# Altium PCB BLE113.PcbDoc
Units mm, origin at the board's own origin, x right, y up, seen from the top; angles counter-clockwise.
Board outline 25 x 25 mm, 2 copper layers (Top Layer, Bottom Layer); 16 components, 46 nets, 158 pads, 65 vias.
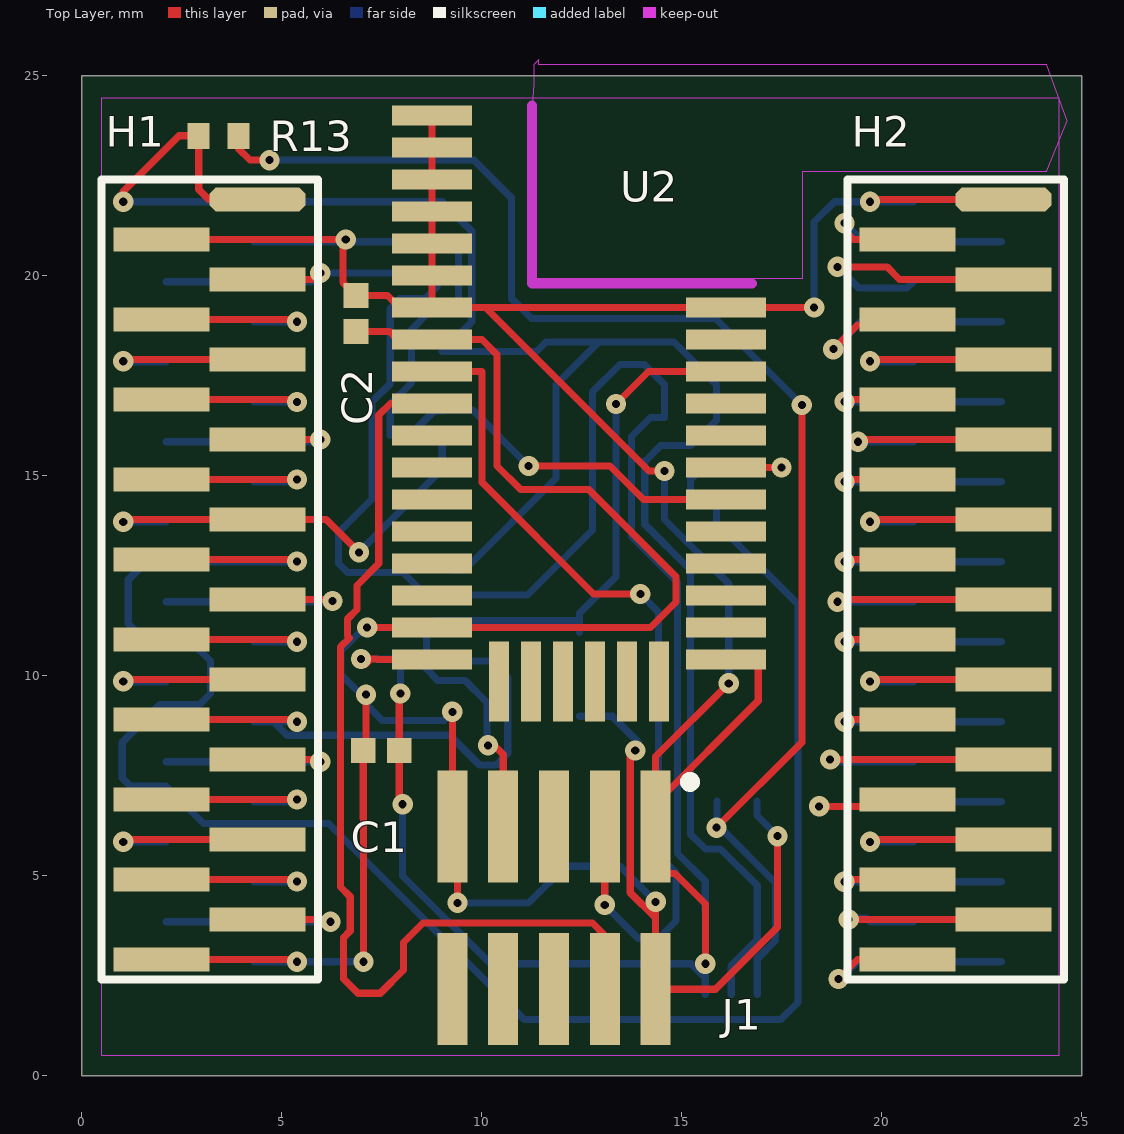
[diagram p0: Top Layer view]
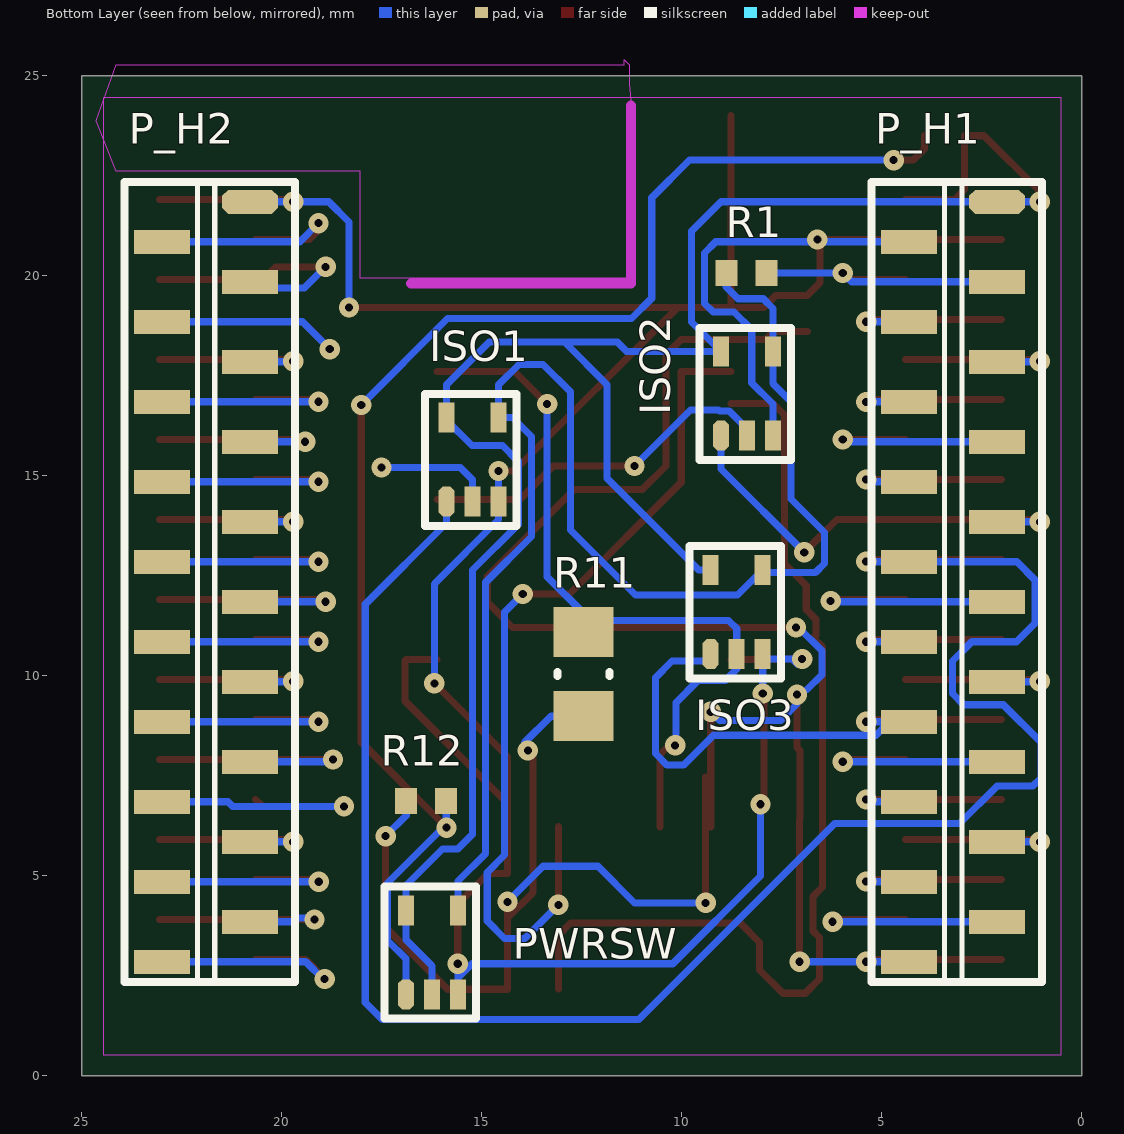
[diagram p1: Bottom Layer view, seen from below]

## Layer stack, top to bottom
Top Layer: signal copper 0.0356
Dielectric: dielectric 0.32, FR-4, Dk 4.8
Bottom Layer: signal copper 0.0356

## Board outline
0,0 25,0 25,25 0,25

## Design rules (kind name [scope] priority, off if disabled: settings)
Clearance "Clearance~Sunstone Circuits" [All] p1: gap=0.152 // Sunstone Circuits Minimum Clearance Rule (MLB~4&6 Layer Designs)
HoleSize "HoleSize~Sunstone Circuits" [All] p1: absolutevalues=TRUE maxlimit=6.375 minlimit=0.203 maxpercent=80.000 minpercent=20.000 // Sunstone Circuits Hole Size Rule (MLB~4&6 Layer Designs)
HoleSize Testpoint [All] p2: absolutevalues=TRUE maxlimit=2.54 minlimit=0.025 maxpercent=80.000 minpercent=20.000
HoleSize TestPointUsage [All] p3: absolutevalues=TRUE maxlimit=2.54 minlimit=0.025 maxpercent=80.000 minpercent=20.000
MinimumAnnularRing "MinimumAnnularRing~Sunstone Circuits" [All] p1: minimumring=0.152 // Sunstone Circuits Minimum Annular Ring (MLB~4&6 Layer Designs)
MinimumSolderMaskSliver [All] p1: minsoldermaskwidth=0.127
PlaneClearance "PlaneClearance~Sunstone Circuits" [All] p1: clearance=0.305 // Sunstone Circuits Power Plane Clearance Rule (MLB~4&6 Layer Designs)
PlaneConnect "PlaneConnect~Sunstone Circuits" [All] p1: planeconnectstyle=Relief reliefexpansion=0.254 reliefentries=4 reliefconductorwidth=0.203 reliefairgap=0.254 // Sunstone Circuits Power Plane Connect Rule (MLB~4&6 Layer Designs)
PolygonConnect "PolygonConnect~Sunstone Circuits" [All] p1: connectstyle=Relief reliefconductorwidth=0.203 reliefentries=4 polygonreliefangle="90 Angle" airgapwidth=0.254 // Sunstone Circuits Polygon Connect Style (MLB~4&6 Layer Designs)
RoutingVias "RoutingVias~Sunstone Circuits" [All] p1: holewidth=0.203 width=0.508 viastyle="Through Hole" minholewidth=0.203 minwidth=0.508 maxholewidth=0.203 maxwidth=0.508 // Sunstone Circuits Routing Vias Rule (MLB~4&6 Layer Designs)
SMDNeckDown [All] p1: percent=100.000
ShortCircuit "ShortCircuit~Sunstone Circuits" [All] p1: allowed=FALSE // Sunstone Circuits Short Circuit Rule~Do Not Allow (MLB~4&6 Layer Designs)
SolderMaskExpansion "SolderMaskExpansion~Sunstone Circuits" [All] p1: expansion=0.076 // Sunstone Circuits Solder Mask Expansion Rule (MLB~4&6 Layer Designs)
ViasUnderSMD "ViasUnderSMD~Sunstone Circuits" [All] p1: allowed=FALSE // Sunstone Circuits Vias Under SMD~Do Not Allow (MLB~4&6 Layer Designs)
Width "Width~Sunstone Circuits" [All] p1: maxlimit=0.178 minlimit=0.178 preferedwidth=0.178 // Sunstone Circuits Minimum Width Rule (MLB~4&6 Layer Designs)
23 further rules are at their usual default settings.

## Components (designator, comment, footprint, x,y, rotation, side; value= is the part's Value field where it differs from the comment)
C1 "CAP 470nF 4V 0402(1005)" CAPC0402(1005)60_N 7.493,8.128 r180 top
C2 "CAP 470nF 4V 0402(1005)" CAPC0402(1005)60_N 6.858,19.05 r270 top
H1 "Bus_Header_1" "Male Single row 20 pin header" 2,21.9 r0 top
H2 "Bus_Header_2" "Male Single row 20 pin header" 20.65,21.9 r0 top
ISO1 "ISL84715" ISL84715 15.875,14.351 r90 bottom
ISO2 "ISL84715" ISL84715 9.017,16.002 r90 bottom
ISO3 "ISL84715" ISL84715 9.271,10.541 r90 bottom
J1 "JTAG" FTSH-105-XX-X-DV 11.811,4.191 r0 top
P_H1 "Bus_Header_1" "SMT 20 -pin single row female header" 4.314,21.844 r180 bottom
P_H2 "Bus_Header_2" "SMT 20 -pin single row female header" 22.991,21.844 r180 bottom
PWRSW "ISL84715" ISL84715 16.891,2.032 r90 bottom
R1 "Jumper 0402(1005)" RESC0402(1005)_N 8.382,20.066 r180 bottom
R11 "5R1 5% 0805(2012)" RESC0805(2012)_M 12.446,10.033 r270 bottom
R12 "1R 5% 0402(1005)" RESC0402(1005)_N 16.383,6.858 r180 bottom
R13 "Jumper 0402(1005)" RESC0402(1005)_N 3.429,23.495 r0 top
U2 "BlueGiga" BlueGiga 8.763,24.003 r0 top

## Footprints (in the part's own frame and the unit in brackets; to place one, negate y for a bottom-side part, rotate by r counter-clockwise, add the part's x,y. Pads: shape width x height; smd on the part's side, far side on the other; paste and mask are expansions set on the pad)
BlueGiga [mm]
  rect 2x0.5 smd: 1(0,0) 2(0,-0.8) 3(0,-1.6) 4(0,-2.4) 5(0,-3.2) 6(0,-4) 7(0,-4.8) 8(0,-5.6) 9(0,-6.4) 10(0,-7.2) 11(0,-8) 12(0,-8.8) 13(0,-9.6) 14(0,-10.4) 15(0,-11.2) 16(0,-12) 17(0,-12.8) 18(0,-13.6) 25(7.35,-13.6) 26(7.35,-12.8) 27(7.35,-12) 28(7.35,-11.2) 29(7.35,-10.4) 30(7.35,-9.6) 31(7.35,-8.8) 32(7.35,-8) 33(7.35,-7.2) 34(7.35,-6.4) 35(7.35,-5.6) 36(7.35,-4.8)
  rect 0.5x2 smd: 19(1.675,-14.15) 20(2.475,-14.15) 21(3.275,-14.15) 22(4.075,-14.15) 23(4.875,-14.15) 24(5.675,-14.15)
  Keep-Out Layer lines w0.254: 2.5,0.25 2.5,-4.2 8,-4.2
CAPC0402(1005)60_N [mm] "Chip Capacitor, Body 1.0x0.5mm, Height 0.6mm, IPC Medium Density"
  rect 0.62x0.62 smd: 1(-0.45,0) 2(0.45,0)
  body extent -0.55,-0.3 0.55,0.3, height 0.6
FTSH-105-XX-X-DV [mm]
  rect 0.75x2.8 smd mask+0: 1(2.54,2.03) 2(2.54,-2.03) 3(1.27,2.03) 4(1.27,-2.03) 5(0,2.03) 6(0,-2.03) 7(-1.27,2.03) 8(-1.27,-2.03) 9(-2.54,2.03) 10(-2.54,-2.03)
  silkscreen extent 3.28,3.03 3.52,3.27, body extent -3.17,-2.92 3.18,2.92, height 5.96
ISL84715 [mm]
  oct 0.75x0.4 smd: 1(0,0)
  rect 0.75x0.4 smd: 2(0,-0.65) 3(0,-1.3) 4(2.1,-1.3) 5(2.1,0)
  silkscreen extent -0.61,-1.75 2.69,0.53
"Male Single row 20 pin header" [mm]
  oct 2.4x0.6 smd: 1(2.4,0)
  rect 2.4x0.6 smd: 2(0,-1) 3(2.4,-2) 4(0,-3) 5(2.4,-4) 6(0,-5) 7(2.4,-6) 8(0,-7) 9(2.4,-8) 10(0,-9) 11(2.4,-10) 12(0,-11) 13(2.4,-12) 14(0,-13) 15(2.4,-14) 16(0,-15) 17(2.4,-16) 18(0,-17) 19(2.4,-18) 20(0,-19)
  silkscreen extent -1.5,-19.5 3.91,0.5
RESC0402(1005)_N [mm] "Chip Resistor, Body 1.0x0.5mm, IPC Medium Density"
  rect 0.55x0.65 smd: 1(-0.5,0) 2(0.5,0)
  body extent -0.52,-0.27 0.53,0.28, height 0.4
RESC0805(2012)_M [mm] "Chip Resistor, Body 2.0x1.3mm, IPC Low Density"
  rect 1.25x1.5 smd: 1(-1.05,0) 2(1.05,0)
  silkscreen extent -0.05,-0.65 0.05,0.65, body extent -1.1,-0.67 1.1,0.67, height 0.7
"SMT 20 -pin single row female header" [mm]
  oct 1.4x0.6 smd: 1(2.2,0)
  rect 1.4x0.6 smd: 2(0,-1) 3(2.2,-2) 4(0,-3) 5(2.2,-4) 6(0,-5) 7(2.2,-6) 8(0,-7) 9(2.2,-8) 10(0,-9) 11(2.2,-10) 12(0,-11) 13(2.2,-12) 14(0,-13) 15(2.2,-14) 16(0,-15) 17(2.2,-16) 18(0,-17) 19(2.2,-18) 20(0,-19)
  silkscreen extent -0.94,-19.5 3.33,0.5, body extent -0.8,-19.4 3,0.4, height 2.1

## Part data
C1 C2: library part CMP-1034-02101-1, "CAP 470nF 4V ±10% 0402 (1005 Metric) Thickness 0.6mm SMD"
J1: library part CC_JTAG, "CC_JTAG"
R1 R13: library part CMP-1011-00001-1, "Jumper 0402 (1005 Metric)"
R11: library part CMP-1013-00019-1, "5R1 0.125W 5% 0805 (2012 Metric)  SMD"
R12: library part CMP-1011-00002-1, "1R 0.063W 5% 0402 (1005 Metric)  SMD"

## Via types
v1: diameter 0.508, hole 0.203, Top Layer to Bottom Layer, 65 vias

## Nets (pads, with @x,y where several pads share a name; then routed paths per layer and width w, separated by ;. In a path a pad name is that pad's centre, name@x,y a point inside that pad or via, vN(x,y) a via of type N, cw(c..) or ccw(c..) an arc to the next point about the centre after c; other vN are vias at no path point)
DC: J1.3 U2.9 | length 21.9
  Top Layer w0.178: U2.9 10.008,17.603 10.008,14.834 12.802,12.04 v1(13.97,12.04) ; v1(13.081,4.267) J1.3
  Bottom Layer w0.178: v1(13.081,4.267) 13.919,3.429 14.427,3.429 14.859,3.861 14.859,5.08 14.427,5.512 14.427,11.582 v1(13.97,12.04)
DD: J1.4 U2.10 | length 25.4
  Top Layer w0.178: U2.10 7.722,16.803 7.429,16.511 7.429,12.802 6.883,12.255 6.883,11.648 6.644,11.408 6.644,10.998 6.7,10.942 6.477,10.719 6.477,4.712 6.718,4.47 6.718,3.619 6.553,3.454 6.553,2.413 6.909,2.057 7.468,2.057 8.052,2.642 8.052,3.327 8.534,3.81 12.776,3.81 13.081,3.505 J1.4
E118: H1.18 P_H1.18 | length 4.5
  Top Layer w0.178: H1.18 5.336,4.9 v1(5.385,4.851)
  Bottom Layer w0.178: P_H1.18 5.377,4.844 v1(5.385,4.851)
E119: H1.19 P_H1.19 | length 6
  Top Layer w0.178: H1.19 6.167,3.9 v1(6.223,3.844)
  Bottom Layer w0.178: P_H1.19 v1(6.223,3.844)
E218: H2.18 P_H2.18 | length 5.5
  Top Layer w0.178: v1(19.069,4.844) 19.125,4.9 H2.18
  Bottom Layer w0.178: v1(19.069,4.844) P_H2.18
E219: H2.19 P_H2.19 | length 5.8
  Top Layer w0.178: v1(19.177,3.9) H2.19
  Bottom Layer w0.178: v1(19.177,3.9) 19.087,3.9 19.05,3.937 19.617,3.937 19.71,3.844 P_H2.19
E220: H2.20 P_H2.20 | length 6.2
  Top Layer w0.178: v1@18.966,2.413 v1(18.923,2.413) 18.923,2.426 19.397,2.9 H2.20
  Bottom Layer w0.178: v1(18.923,2.413) 18.966,2.413 19.397,2.844 P_H2.20
EE117: H1.17 P_H1.17 | length 4.5
  Top Layer w0.178: v1(1.041,5.842) 1.099,5.9 H1.17
  Bottom Layer w0.178: v1(1.041,5.842) 1.043,5.844 P_H1.17
EH_VCC: H1.1 ISO1.5 ISO2.5 ISO3.5 P_H1.1 PWRSW.2 PWRSW.5 R13.1 | length 50.9
  Top Layer w0.178: v1(1.041,21.844) 1.041,22.098 2.438,23.495 R13.1 2.929,22.149 3.178,21.9 H1.1
  Bottom Layer w0.178: v1(1.041,21.844) P_H1.1 9.017,21.844 9.754,21.107 9.754,18.839 ISO2.5 11.371,18.102 11.608,18.339 12.929,18.339 ; ISO3.5 9.571,12.641 11.862,14.932 11.862,17.272 12.929,18.339 ; PWRSW.2 16.241,2.743 16.891,3.393 PWRSW.5 16.891,4.75 15.977,5.664 15.595,5.664 15.227,6.032 15.227,12.637 14.08,13.784 14.08,15.367 14.097,15.367 14.478,15.748 15.24,15.748 15.875,16.383 ISO1.5 15.875,17.272 14.808,18.339 12.929,18.339
GND: C1.1 C2.1 H1.2 H2.1 ISO1.3 ISO2.3 ISO3.3 J1.1 P_H1.2 P_H2.1 PWRSW.3 U2.1 U2.2 U2.3 U2.4 U2.5 U2.6 U2.7 U2.18 U2.25 U2.36 | length 85.8
  Top Layer w0.178: H1.2 v1@6.536,20.9 ; v1(6.604,20.9) v1@6.536,20.9 ; v1(6.985,10.414) 7.112,10.287 7.239,10.414 7.391,10.414 7.402,10.403 U2.18 ; v1(7.971,9.55) 7.943,9.522 C1.1 7.943,6.865 v1(8.026,6.782) ; U2.1 U2.2 U2.3 U2.4 U2.5 U2.6 U2.7 ; v1(14.575,15.113) 14.187,15.113 10.097,19.203 ; v1(15.596,2.794) 15.596,4.293 14.834,5.055 14.351,5.055 J1.1 J1.1@14.351,6.803 ; U2.25 16.891,10.403 16.918,10.376 16.918,9.371 J1.1@14.351,6.803 ; v1(16.18,9.804) 14.351,7.976 J1.1@14.351,6.803 ; v1(18.313,19.203) U2.36 10.097,19.203 ; v1(19.71,21.844) 19.766,21.9 H2.1 ; v1@6.536,20.9 6.536,19.822 C2.1 7.645,19.5 7.942,19.203 U2.7 ; U2.7 10.097,19.203
  Bottom Layer w0.178: P_H1.2 v1@6.548,20.844 ; v1(6.604,20.9) v1@6.548,20.844 ; v1(6.985,10.414) 7.112,10.287 7.239,10.414 7.844,10.414 ISO3.3 v1(7.971,9.55) ; ISO2.3 7.717,16.789 8.245,17.318 8.245,18.645 8.689,19.089 9.208,19.089 9.423,19.304 9.423,20.565 9.144,20.844 v1@6.548,20.844 ; v1(8.026,6.782) 8.026,4.989 10.222,2.794 15.24,2.794 15.591,2.443 ; v1(14.575,15.113) ISO1.3 14.575,13.898 16.18,12.294 v1(16.18,9.804) ; PWRSW.3 15.591,2.443 ; v1(15.596,2.794) 15.591,2.794 15.591,2.443 ; v1(18.313,19.203) 18.313,21.336 18.821,21.844 v1(19.71,21.844) P_H2.1
N10: H1.15 P_H1.15 | length 5.4
  Top Layer w0.178: H1.15 5.913,7.9 v1(5.969,7.844)
  Bottom Layer w0.178: P_H1.15 v1(5.969,7.844)
N11: H1.13 P_H1.13 | length 4.5
  Top Layer w0.178: v1(1.041,9.855) 1.086,9.9 H1.13
  Bottom Layer w0.178: v1(1.041,9.855) 1.053,9.844 P_H1.13
N12: H1.14 ISO3.1 P_H1.14 | length 14.5
  Top Layer w0.178: H1.14 5.329,8.9 v1(5.385,8.844)
  Bottom Layer w0.178: P_H1.14 P_H1.14@4.801,8.844 ; v1(5.385,8.844) P_H1.14@4.801,8.844 ; ISO3.1 9.271,10.363 10.236,10.363 10.655,9.944 10.655,8.05 10.365,7.76 9.955,7.76 9.206,8.509 5.136,8.509 P_H1.14@4.801,8.844
N13: H2.13 P_H2.13 | length 4.4
  Top Layer w0.178: v1(19.71,9.855) 19.755,9.9 H2.13
  Bottom Layer w0.178: v1(19.71,9.855) 19.722,9.844 P_H2.13
N14: H2.14 P_H2.14 | length 5.5
  Top Layer w0.178: v1(19.075,8.844) 19.131,8.9 H2.14
  Bottom Layer w0.178: v1(19.075,8.844) P_H2.14
N15: H1.16 P_H1.16 | length 4.5
  Top Layer w0.178: H1.16 v1(5.385,6.9)
  Bottom Layer w0.178: P_H1.16 5.329,6.844 v1(5.385,6.9)
N16: H2.9 P_H2.9 | length 4.4
  Top Layer w0.178: v1(19.71,13.844) 19.766,13.9 H2.9
  Bottom Layer w0.178: v1(19.71,13.844) P_H2.9
N17: H2.10 P_H2.10 | length 5.5
  Top Layer w0.178: v1(19.075,12.844) 19.131,12.9 H2.10
  Bottom Layer w0.178: v1(19.075,12.844) P_H2.10
N20: H1.10 ISO1.1 P_H1.10 | length 48.7
  Top Layer w0.178: H1.10 5.337,12.9 v1(5.385,12.852)
  Bottom Layer w0.178: v1(5.385,12.852) 5.376,12.844 P_H1.10 1.617,12.844 1.168,12.395 1.168,11.303 1.626,10.846 2.743,10.846 3.226,10.363 3.226,9.55 2.946,9.271 1.956,9.271 1.016,8.331 1.016,7.442 1.219,7.239 2.108,7.239 3.048,6.299 6.172,6.299 11.074,1.397 17.475,1.397 17.907,1.829 17.907,11.785 15.875,13.817 ISO1.1
N21: H1.9 ISO2.1 P_H1.9 | length 11.1
  Top Layer w0.178: v1(1.041,13.843) 1.098,13.9 H1.9 6.115,13.9 v1(6.934,13.081)
  Bottom Layer w0.178: v1(1.041,13.843) v1(1.041,13.843) P_H1.9 ; v1(6.934,13.081) 9.017,15.164 ISO2.1
N22: H1.12 P_H1.12 | length 4.5
  Top Layer w0.178: H1.12 5.329,10.9 v1(5.385,10.844)
  Bottom Layer w0.178: P_H1.12 v1(5.385,10.844)
N23: H2.5 P_H2.5 | length 4.4
  Top Layer w0.178: v1(19.71,17.856) 19.754,17.9 H2.5
  Bottom Layer w0.178: v1(19.71,17.856) 19.723,17.844 P_H2.5
N24: H2.6 P_H2.6 | length 5.5
  Top Layer w0.178: v1(19.075,16.844) 19.131,16.9 H2.6
  Bottom Layer w0.178: v1(19.075,16.844) P_H2.6
N25: H2.8 P_H2.8 | length 5.5
  Top Layer w0.178: v1(19.075,14.844) 19.131,14.9 H2.8
  Bottom Layer w0.178: v1(19.075,14.844) P_H2.8
N26: H2.7 P_H2.7 | length 5
  Top Layer w0.178: v1(19.411,15.844) 19.467,15.9 H2.7
  Bottom Layer w0.178: v1(19.411,15.844) P_H2.7
N27: H2.4 P_H2.4 | length 5.3
  Top Layer w0.178: v1(18.796,18.161) 19.397,18.762
  Bottom Layer w0.178: v1(18.796,18.161) 19.479,18.844 P_H2.4
N30: H2.3 P_H2.3 | length 6.5
  Top Layer w0.178: v1(18.898,20.218) 20.133,20.218 20.451,19.9 H2.3
  Bottom Layer w0.178: v1(18.898,20.218) 19.431,19.685 20.632,19.685 P_H2.3
N31: H2.2 P_H2.2 | length 6
  Top Layer w0.178: v1(19.075,21.311) 19.075,21.126 19.302,20.9 H2.2
  Bottom Layer w0.178: v1(19.075,21.311) 19.542,20.844 P_H2.2
N32: H1.7 P_H1.7 | length 5.4
  Top Layer w0.178: H1.7 v1(5.969,15.9)
  Bottom Layer w0.178: P_H1.7 5.913,15.844 v1(5.969,15.9)
N33: H1.11 P_H1.11 | length 6.1
  Top Layer w0.178: H1.11 6.236,11.9 v1(6.274,11.862)
  Bottom Layer w0.178: P_H1.11 6.256,11.844 v1(6.274,11.862)
N34: H1.6 P_H1.6 | length 4.5
  Top Layer w0.178: H1.6 5.325,16.9 v1(5.385,16.84)
  Bottom Layer w0.178: P_H1.6 5.381,16.844 v1(5.385,16.84)
N35: H2.16 P_H2.16 | length 6.9
  Top Layer w0.178: v1(18.44,6.731) 20.481,6.731 H2.16
  Bottom Layer w0.178: v1(18.44,6.731) 21.223,6.731 21.336,6.844 P_H2.16
N36: H2.15 P_H2.15 | length 6.4
  Top Layer w0.178: v1(18.715,7.9) H2.15
  Bottom Layer w0.178: v1(18.715,7.9) 18.771,7.844 P_H2.15
N37: H1.5 P_H1.5 | length 4.5
  Top Layer w0.178: v1(1.041,17.856) 1.085,17.9 H1.5
  Bottom Layer w0.178: v1(1.041,17.856) 1.054,17.844 P_H1.5
N40: H1.3 P_H1.3 R1.2 | length 7.5
  Top Layer w0.178: H1.3 5.803,19.9 v1(5.969,20.066)
  Bottom Layer w0.178: P_H1.3 5.747,19.844 v1(5.969,20.066) R1.2
N41: H1.4 P_H1.4 | length 4.5
  Top Layer w0.178: H1.4 5.332,18.9 v1(5.385,18.847)
  Bottom Layer w0.178: P_H1.4 5.382,18.844 v1(5.385,18.847)
N42: H2.11 P_H2.11 | length 6.1
  Top Layer w0.178: v1(18.898,11.844) 18.954,11.9 H2.11
  Bottom Layer w0.178: v1(18.898,11.844) P_H2.11
N43: H1.8 P_H1.8 | length 4.5
  Top Layer w0.178: H1.8 v1(5.385,14.9)
  Bottom Layer w0.178: P_H1.8 5.329,14.844 v1(5.385,14.9)
N44: H2.12 P_H2.12 | length 5.5
  Top Layer w0.178: v1(19.075,10.844) 19.131,10.9 H2.12
  Bottom Layer w0.178: v1(19.075,10.844) P_H2.12
N45: H2.17 P_H2.17 | length 4.4
  Top Layer w0.178: v1(19.71,5.842) 19.768,5.9 H2.17
  Bottom Layer w0.178: v1(19.71,5.842) 19.712,5.844 P_H2.17
ON20: ISO1.2 U2.31 | length 4.3
  Top Layer w0.178: U2.31 v1(17.501,15.203)
  Bottom Layer w0.178: ISO1.2 15.225,14.895 15.533,15.203 v1(17.501,15.203)
ON21: ISO2.2 U2.30 | length 9
  Top Layer w0.178: v1(11.176,15.24) 13.208,15.24 14.045,14.403 U2.30
  Bottom Layer w0.178: ISO2.2 8.367,16.168 8.817,16.618 9.054,16.618 9.073,16.637 9.779,16.637 v1(11.176,15.24)
ONRST: ISO3.2 J1.7 R11.1 U2.34 | length 19.5
  Top Layer w0.178: v1(10.16,8.255) 10.16,8.407 10.541,8.026 J1.7 ; v1(13.36,16.79) 14.173,17.603 U2.34
  Bottom Layer w0.178: v1(10.16,8.255) 10.135,8.28 10.135,9.327 9.581,9.881 8.9,9.881 8.621,10.16 ISO3.2 8.621,11.176 8.824,11.379 R11.1@12.446,11.379 ; R11.1 R11.1@12.446,11.379 ; v1(13.36,16.79) 13.36,12.471 12.446,11.557 R11.1@12.446,11.379
P_EN: ISO1.4 ISO2.4 ISO3.4 PWRSW.4 R1.1 | length 36.3
  Bottom Layer w0.178: R1.1 8.882,19.71 8.591,19.419 7.956,19.419 7.717,19.181 ISO2.4 7.717,17.297 7.264,16.845 7.264,14.414 6.426,13.576 6.426,12.802 6.647,12.581 7.971,12.581 ISO3.4 8.598,12.014 11.151,12.014 12.776,13.64 12.776,17.094 13.462,17.78 14.067,17.78 14.575,17.272 ISO1.4 14.224,16.451 13.749,15.976 13.749,13.479 14.897,12.332 14.897,5.555 15.591,4.861 PWRSW.4
PWR_RAD: PWRSW.1 R12.2 R13.2 | length 35.7
  Top Layer w0.178: R13.2 3.929,23.165 4.208,22.885 v1(4.699,22.885) ; v1(15.875,6.198) 18.009,8.331 v1(18.009,16.764)
  Bottom Layer w0.178: v1(4.699,22.885) 9.804,22.885 10.744,21.946 10.744,19.431 11.252,18.923 15.85,18.923 v1(18.009,16.764) ; v1(15.875,6.198) v1@15.883,6.206 ; R12.2 v1@15.883,6.206 ; PWRSW.1 16.891,2.921 17.348,3.378 17.348,4.815 15.966,6.198 v1@15.883,6.206
RAD_VCC: C1.2 C2.2 H1.20 J1.2 J1.9 P_H1.20 R11.2 R12.1 U2.8 U2.17 | length 65.8
  Top Layer w0.178: H1.20 5.33,2.9 v1(5.385,2.845) ; C2.2 7.696,18.6 7.893,18.403 U2.8 10.008,18.403 10.389,18.022 10.389,15.24 10.973,14.656 12.675,14.656 14.859,12.471 14.859,11.838 14.224,11.203 U2.17 v1(7.139,11.203) ; v1(7.048,2.845) 7.048,4.669 C1.2 7.112,8.197 v1(7.112,9.523) ; J1.9 v1(9.271,9.093) ; v1(9.398,4.318) J1.9@9.398,7.469 ; v1(13.843,8.128) 13.843,8.255 13.716,8.128 13.716,4.572 14.351,3.937 ; v1(14.351,4.343) 14.351,3.937 ; v1(17.399,5.986) 17.399,3.708 15.85,2.159 14.351,2.159 J1.2 14.351,3.937
  Bottom Layer w0.178: P_H1.20 v1(5.385,2.845) v1(7.048,2.845) ; 6.862,9.648 6.49,10.02 6.49,10.619 7.074,11.203 v1(7.139,11.203) ; v1@7.112,9.285 7.519,8.878 9.055,8.878 v1(9.271,9.093) ; v1(9.398,4.318) 11.176,4.318 12.09,5.232 13.462,5.232 v1(14.351,4.343) ; R11.2 13.267,8.983 13.919,8.331 13.843,8.255 v1(13.843,8.128) ; R12.1 16.883,6.502 v1(17.399,5.986)
pads on no net: J1.5 J1.6 J1.8 J1.10 U2.11 U2.12 U2.13 U2.14 U2.15 U2.16 U2.19 U2.20 U2.21 U2.22 U2.23 U2.24 U2.26 U2.27 U2.28 U2.29 U2.32 U2.33 U2.35

## Keep-outs
Keep-Out Layer:
  pour cut-out: 11.303,25.273 11.303,24.8 11.263,24.253 11.263,19.939 18.034,19.939 18.034,22.606 24.13,22.606 24.638,23.876 24.13,25.273 11.43,25.273 11.43,25.4
  lines w0.025: 0.508,0.508 0.508,24.445 24.445,24.445 24.445,0.508 0.508,0.508

## Other copper
Top Layer:
  pour cut-out: 11.303,25.273 11.303,24.8 11.263,24.253 11.263,19.939 18.034,19.939 18.034,22.606 24.13,22.606 24.638,23.876 24.13,25.273 11.43,25.273 11.43,25.4
Bottom Layer:
  pour cut-out: 11.303,25.273 11.303,24.8 11.263,24.253 11.263,19.939 18.034,19.939 18.034,22.606 24.13,22.606 24.638,23.876 24.13,25.273 11.43,25.273 11.43,25.4

## Silkscreen, mask and mechanical layers (free items; w line width, h text height)
Mechanical 3:
  the board outline again, w0.254

## Dimensions
0.508,0.508 to 0.508,24.445 on Mechanical 1
0.508,0.508 to 24.445,0.508 on Mechanical 1